# EAGLE board ai_breakout_mics2714_panel (EAGLE 6.6.0)
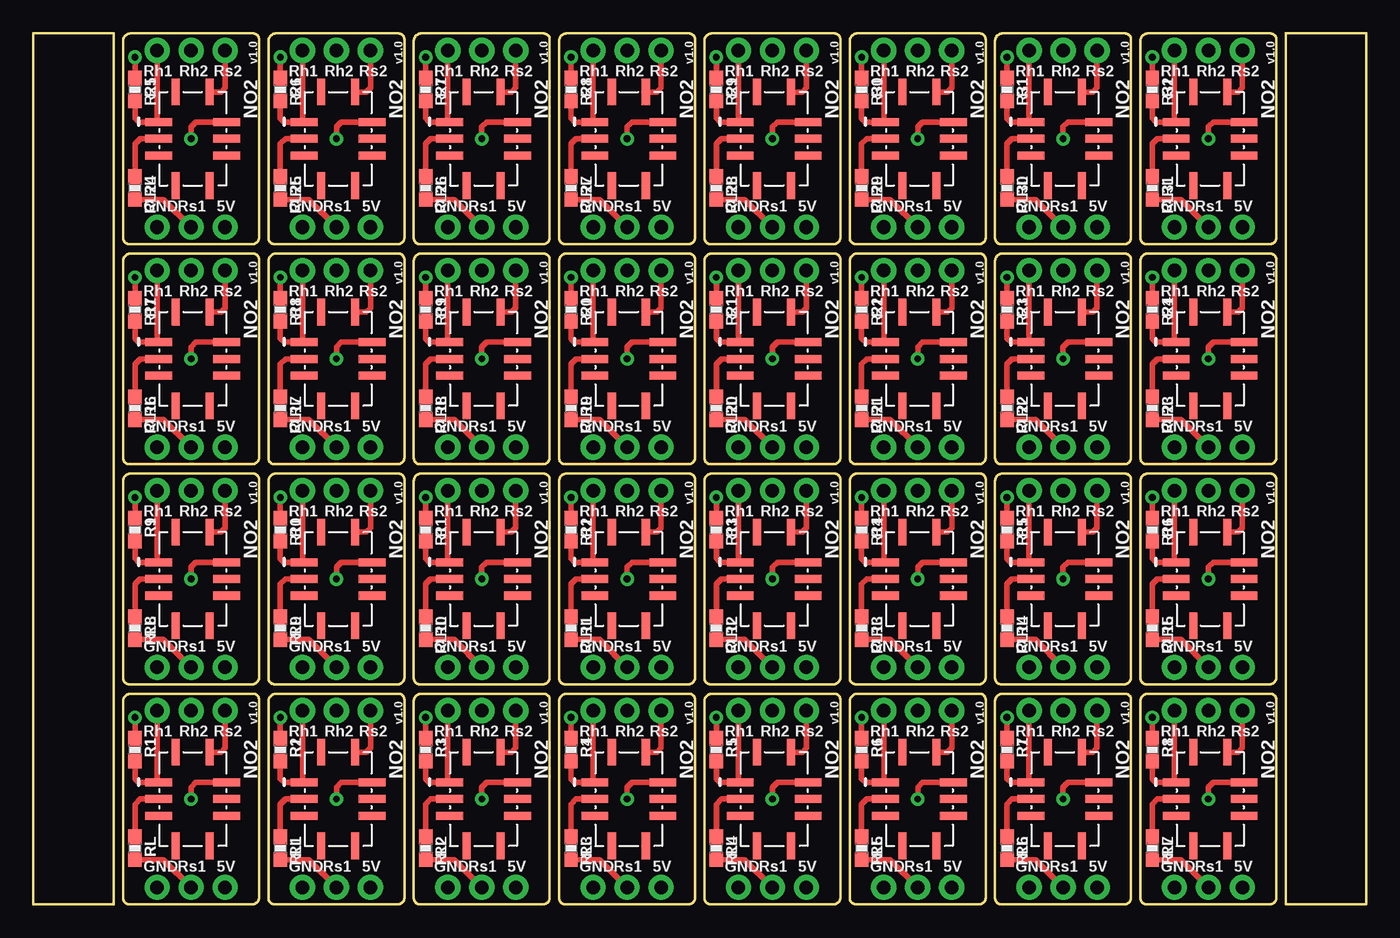
[diagram p0: board, top side]
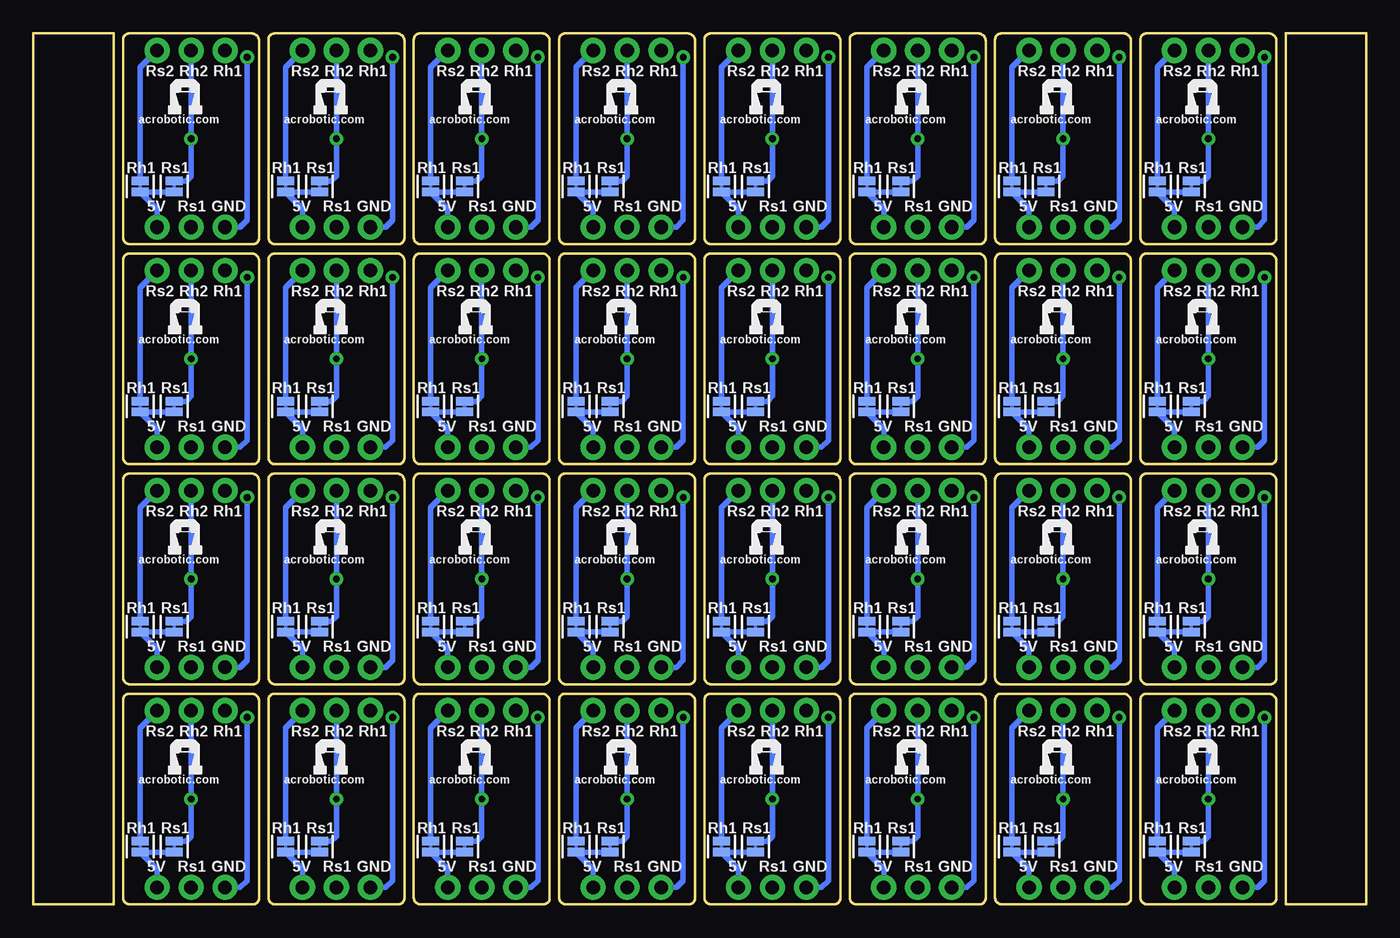
[diagram p1: board, bottom side, seen from below]

Size 99.58 x 65.09 mm. Coordinates in mm from the lower left corner, seen from the top.
Outline: 264 segments
Copper layers (1*16): Top 0.035mm / dielectric 1.5mm / Bottom 0.035mm
Design rules "ai_2layer": minimum track width 7mil, minimum drill 15mil, track to track 8mil, track to pad 8mil, pad to pad 8mil, via to via 8mil, smd to smd 8mil, copper to edge 8mil, drill to drill 8mil, minimum pad ring 12mil, minimum via ring 10mil, stop-mask expansion 4mil, vias tented up to drill 20mil, thermal gap 10mil
Net classes: 0 signal: width 0.254 mm; 1 power: width 0.305 mm

## Footprints (pad centres in the part's own frame; a part is rotated, then mirrored left to right if it is on the bottom)
1X03-NOFIRST = drill 1.016 pad 1.88: 1 -2.54,0; 2 0,0; 3 2.54,0
1X02-SJ-NCT = smd 0.635 x 1.27: 1 -0.401,0; 2 0.413,0
RES-0603 = smd 1.1 x 1: 1 -0.85,0; 2 0.85,0
MICS-2714 = smd 0.6 x 2: A -1.25,-2.54; B 0,-2.54; C 1.25,-2.54; F 1.25,2.54; G 0,2.54; H -1.25,2.54 | smd 2 x 0.6: D 3.5,-1.27; E 3.5,1.27; J -3.5,1.27; K -3.5,-1.27

## Placement (x,y rotation side)
J1  1X03NOFIRST  [1X03-NOFIRST]  11.78,14.48 180 top
J2  1X03NOFIRST  [1X03-NOFIRST]  11.78,1.27 180 top
J3  1X03NOFIRST  [1X03-NOFIRST]  22.64,14.48 180 top
J4  1X03NOFIRST  [1X03-NOFIRST]  22.64,1.27 180 top
J5  1X03NOFIRST  [1X03-NOFIRST]  33.5,14.48 180 top
J6  1X03NOFIRST  [1X03-NOFIRST]  33.5,1.27 180 top
J7  1X03NOFIRST  [1X03-NOFIRST]  44.36,14.48 180 top
J8  1X03NOFIRST  [1X03-NOFIRST]  44.36,1.27 180 top
J9  1X03NOFIRST  [1X03-NOFIRST]  55.22,14.48 180 top
J10  1X03NOFIRST  [1X03-NOFIRST]  55.22,1.27 180 top
J11  1X03NOFIRST  [1X03-NOFIRST]  66.08,14.48 180 top
J12  1X03NOFIRST  [1X03-NOFIRST]  66.08,1.27 180 top
J13  1X03NOFIRST  [1X03-NOFIRST]  76.94,14.48 180 top
J14  1X03NOFIRST  [1X03-NOFIRST]  76.94,1.27 180 top
J15  1X03NOFIRST  [1X03-NOFIRST]  87.8,14.48 180 top
J16  1X03NOFIRST  [1X03-NOFIRST]  87.8,1.27 180 top
J17  1X03NOFIRST  [1X03-NOFIRST]  11.78,30.93 180 top
J18  1X03NOFIRST  [1X03-NOFIRST]  11.78,17.72 180 top
J19  1X03NOFIRST  [1X03-NOFIRST]  22.64,30.93 180 top
J20  1X03NOFIRST  [1X03-NOFIRST]  22.64,17.72 180 top
J21  1X03NOFIRST  [1X03-NOFIRST]  33.5,30.93 180 top
J22  1X03NOFIRST  [1X03-NOFIRST]  33.5,17.72 180 top
J23  1X03NOFIRST  [1X03-NOFIRST]  44.36,30.93 180 top
J24  1X03NOFIRST  [1X03-NOFIRST]  44.36,17.72 180 top
J25  1X03NOFIRST  [1X03-NOFIRST]  55.22,30.93 180 top
J26  1X03NOFIRST  [1X03-NOFIRST]  55.22,17.72 180 top
J27  1X03NOFIRST  [1X03-NOFIRST]  66.08,30.93 180 top
J28  1X03NOFIRST  [1X03-NOFIRST]  66.08,17.72 180 top
J29  1X03NOFIRST  [1X03-NOFIRST]  76.94,30.93 180 top
J30  1X03NOFIRST  [1X03-NOFIRST]  76.94,17.72 180 top
J31  1X03NOFIRST  [1X03-NOFIRST]  87.8,30.93 180 top
J32  1X03NOFIRST  [1X03-NOFIRST]  87.8,17.72 180 top
J33  1X03NOFIRST  [1X03-NOFIRST]  11.78,47.37 180 top
J34  1X03NOFIRST  [1X03-NOFIRST]  11.78,34.17 180 top
J35  1X03NOFIRST  [1X03-NOFIRST]  22.64,47.37 180 top
J36  1X03NOFIRST  [1X03-NOFIRST]  22.64,34.17 180 top
J37  1X03NOFIRST  [1X03-NOFIRST]  33.5,47.37 180 top
J38  1X03NOFIRST  [1X03-NOFIRST]  33.5,34.17 180 top
J39  1X03NOFIRST  [1X03-NOFIRST]  44.36,47.37 180 top
J40  1X03NOFIRST  [1X03-NOFIRST]  44.36,34.17 180 top
J41  1X03NOFIRST  [1X03-NOFIRST]  55.22,47.37 180 top
J42  1X03NOFIRST  [1X03-NOFIRST]  55.22,34.17 180 top
J43  1X03NOFIRST  [1X03-NOFIRST]  66.08,47.37 180 top
J44  1X03NOFIRST  [1X03-NOFIRST]  66.08,34.17 180 top
J45  1X03NOFIRST  [1X03-NOFIRST]  76.94,47.37 180 top
J46  1X03NOFIRST  [1X03-NOFIRST]  76.94,34.17 180 top
J47  1X03NOFIRST  [1X03-NOFIRST]  87.8,47.37 180 top
J48  1X03NOFIRST  [1X03-NOFIRST]  87.8,34.17 180 top
J49  1X03NOFIRST  [1X03-NOFIRST]  11.78,63.82 180 top
J50  1X03NOFIRST  [1X03-NOFIRST]  11.78,50.61 180 top
J51  1X03NOFIRST  [1X03-NOFIRST]  22.64,63.82 180 top
J52  1X03NOFIRST  [1X03-NOFIRST]  22.64,50.61 180 top
J53  1X03NOFIRST  [1X03-NOFIRST]  33.5,63.82 180 top
J54  1X03NOFIRST  [1X03-NOFIRST]  33.5,50.61 180 top
J55  1X03NOFIRST  [1X03-NOFIRST]  44.36,63.82 180 top
J56  1X03NOFIRST  [1X03-NOFIRST]  44.36,50.61 180 top
J57  1X03NOFIRST  [1X03-NOFIRST]  55.22,63.82 180 top
J58  1X03NOFIRST  [1X03-NOFIRST]  55.22,50.61 180 top
J59  1X03NOFIRST  [1X03-NOFIRST]  66.08,63.82 180 top
J60  1X03NOFIRST  [1X03-NOFIRST]  66.08,50.61 180 top
J61  1X03NOFIRST  [1X03-NOFIRST]  76.94,63.82 180 top
J62  1X03NOFIRST  [1X03-NOFIRST]  76.94,50.61 180 top
J63  1X03NOFIRST  [1X03-NOFIRST]  87.8,63.82 180 top
J64  1X03NOFIRST  [1X03-NOFIRST]  87.8,50.61 180 top
JS1  1X02-SJ-NCT  [1X02-SJ-NCT]  15.59,4.32 270 bottom
JS2  1X02-SJ-NCT  [1X02-SJ-NCT]  13.05,4.32 270 bottom
JS3  1X02-SJ-NCT  [1X02-SJ-NCT]  26.45,4.32 270 bottom
JS4  1X02-SJ-NCT  [1X02-SJ-NCT]  23.91,4.32 270 bottom
JS5  1X02-SJ-NCT  [1X02-SJ-NCT]  37.31,4.32 270 bottom
JS6  1X02-SJ-NCT  [1X02-SJ-NCT]  34.77,4.32 270 bottom
JS7  1X02-SJ-NCT  [1X02-SJ-NCT]  48.17,4.32 270 bottom
JS8  1X02-SJ-NCT  [1X02-SJ-NCT]  45.63,4.32 270 bottom
JS9  1X02-SJ-NCT  [1X02-SJ-NCT]  59.03,4.32 270 bottom
JS10  1X02-SJ-NCT  [1X02-SJ-NCT]  56.49,4.32 270 bottom
JS11  1X02-SJ-NCT  [1X02-SJ-NCT]  69.89,4.32 270 bottom
JS12  1X02-SJ-NCT  [1X02-SJ-NCT]  67.35,4.32 270 bottom
JS13  1X02-SJ-NCT  [1X02-SJ-NCT]  80.75,4.32 270 bottom
JS14  1X02-SJ-NCT  [1X02-SJ-NCT]  78.21,4.32 270 bottom
JS15  1X02-SJ-NCT  [1X02-SJ-NCT]  91.61,4.32 270 bottom
JS16  1X02-SJ-NCT  [1X02-SJ-NCT]  89.07,4.32 270 bottom
JS17  1X02-SJ-NCT  [1X02-SJ-NCT]  15.59,20.77 270 bottom
JS18  1X02-SJ-NCT  [1X02-SJ-NCT]  13.05,20.77 270 bottom
JS19  1X02-SJ-NCT  [1X02-SJ-NCT]  26.45,20.77 270 bottom
JS20  1X02-SJ-NCT  [1X02-SJ-NCT]  23.91,20.77 270 bottom
JS21  1X02-SJ-NCT  [1X02-SJ-NCT]  37.31,20.77 270 bottom
JS22  1X02-SJ-NCT  [1X02-SJ-NCT]  34.77,20.77 270 bottom
JS23  1X02-SJ-NCT  [1X02-SJ-NCT]  48.17,20.77 270 bottom
JS24  1X02-SJ-NCT  [1X02-SJ-NCT]  45.63,20.77 270 bottom
JS25  1X02-SJ-NCT  [1X02-SJ-NCT]  59.03,20.77 270 bottom
JS26  1X02-SJ-NCT  [1X02-SJ-NCT]  56.49,20.77 270 bottom
JS27  1X02-SJ-NCT  [1X02-SJ-NCT]  69.89,20.77 270 bottom
JS28  1X02-SJ-NCT  [1X02-SJ-NCT]  67.35,20.77 270 bottom
JS29  1X02-SJ-NCT  [1X02-SJ-NCT]  80.75,20.77 270 bottom
JS30  1X02-SJ-NCT  [1X02-SJ-NCT]  78.21,20.77 270 bottom
JS31  1X02-SJ-NCT  [1X02-SJ-NCT]  91.61,20.77 270 bottom
JS32  1X02-SJ-NCT  [1X02-SJ-NCT]  89.07,20.77 270 bottom
JS33  1X02-SJ-NCT  [1X02-SJ-NCT]  15.59,37.21 270 bottom
JS34  1X02-SJ-NCT  [1X02-SJ-NCT]  13.05,37.21 270 bottom
JS35  1X02-SJ-NCT  [1X02-SJ-NCT]  26.45,37.21 270 bottom
JS36  1X02-SJ-NCT  [1X02-SJ-NCT]  23.91,37.21 270 bottom
JS37  1X02-SJ-NCT  [1X02-SJ-NCT]  37.31,37.21 270 bottom
JS38  1X02-SJ-NCT  [1X02-SJ-NCT]  34.77,37.21 270 bottom
JS39  1X02-SJ-NCT  [1X02-SJ-NCT]  48.17,37.21 270 bottom
JS40  1X02-SJ-NCT  [1X02-SJ-NCT]  45.63,37.21 270 bottom
JS41  1X02-SJ-NCT  [1X02-SJ-NCT]  59.03,37.21 270 bottom
JS42  1X02-SJ-NCT  [1X02-SJ-NCT]  56.49,37.21 270 bottom
JS43  1X02-SJ-NCT  [1X02-SJ-NCT]  69.89,37.21 270 bottom
JS44  1X02-SJ-NCT  [1X02-SJ-NCT]  67.35,37.21 270 bottom
JS45  1X02-SJ-NCT  [1X02-SJ-NCT]  80.75,37.21 270 bottom
JS46  1X02-SJ-NCT  [1X02-SJ-NCT]  78.21,37.21 270 bottom
JS47  1X02-SJ-NCT  [1X02-SJ-NCT]  91.61,37.21 270 bottom
JS48  1X02-SJ-NCT  [1X02-SJ-NCT]  89.07,37.21 270 bottom
JS49  1X02-SJ-NCT  [1X02-SJ-NCT]  15.59,53.66 270 bottom
JS50  1X02-SJ-NCT  [1X02-SJ-NCT]  13.05,53.66 270 bottom
JS51  1X02-SJ-NCT  [1X02-SJ-NCT]  26.45,53.66 270 bottom
JS52  1X02-SJ-NCT  [1X02-SJ-NCT]  23.91,53.66 270 bottom
JS53  1X02-SJ-NCT  [1X02-SJ-NCT]  37.31,53.66 270 bottom
JS54  1X02-SJ-NCT  [1X02-SJ-NCT]  34.77,53.66 270 bottom
JS55  1X02-SJ-NCT  [1X02-SJ-NCT]  48.17,53.66 270 bottom
JS56  1X02-SJ-NCT  [1X02-SJ-NCT]  45.63,53.66 270 bottom
JS57  1X02-SJ-NCT  [1X02-SJ-NCT]  59.03,53.66 270 bottom
JS58  1X02-SJ-NCT  [1X02-SJ-NCT]  56.49,53.66 270 bottom
JS59  1X02-SJ-NCT  [1X02-SJ-NCT]  69.89,53.66 270 bottom
JS60  1X02-SJ-NCT  [1X02-SJ-NCT]  67.35,53.66 270 bottom
JS61  1X02-SJ-NCT  [1X02-SJ-NCT]  80.75,53.66 270 bottom
JS62  1X02-SJ-NCT  [1X02-SJ-NCT]  78.21,53.66 270 bottom
JS63  1X02-SJ-NCT  [1X02-SJ-NCT]  91.61,53.66 270 bottom
JS64  1X02-SJ-NCT  [1X02-SJ-NCT]  89.07,53.66 270 bottom
R1  131  [RES-0603]  7.59,11.56 270 top
R2  131  [RES-0603]  18.45,11.56 270 top
R3  131  [RES-0603]  29.31,11.56 270 top
R4  131  [RES-0603]  40.17,11.56 270 top
R5  131  [RES-0603]  51.03,11.56 270 top
R6  131  [RES-0603]  61.89,11.56 270 top
R7  131  [RES-0603]  72.75,11.56 270 top
R8  131  [RES-0603]  83.61,11.56 270 top
R9  131  [RES-0603]  7.59,28 270 top
R10  131  [RES-0603]  18.45,28 270 top
R11  131  [RES-0603]  29.31,28 270 top
R12  131  [RES-0603]  40.17,28 270 top
R13  131  [RES-0603]  51.03,28 270 top
R14  131  [RES-0603]  61.89,28 270 top
R15  131  [RES-0603]  72.75,28 270 top
R16  131  [RES-0603]  83.61,28 270 top
R17  131  [RES-0603]  7.59,44.45 270 top
R18  131  [RES-0603]  18.45,44.45 270 top
R19  131  [RES-0603]  29.31,44.45 270 top
R20  131  [RES-0603]  40.17,44.45 270 top
R21  131  [RES-0603]  51.03,44.45 270 top
R22  131  [RES-0603]  61.89,44.45 270 top
R23  131  [RES-0603]  72.75,44.45 270 top
R24  131  [RES-0603]  83.61,44.45 270 top
R25  131  [RES-0603]  7.59,60.9 270 top
R26  131  [RES-0603]  18.45,60.9 270 top
R27  131  [RES-0603]  29.31,60.9 270 top
R28  131  [RES-0603]  40.17,60.9 270 top
R29  131  [RES-0603]  51.03,60.9 270 top
R30  131  [RES-0603]  61.89,60.9 270 top
R31  131  [RES-0603]  72.75,60.9 270 top
R32  131  [RES-0603]  83.61,60.9 270 top
RL  820  [RES-0603]  7.59,4.19 270 top
RL1  820  [RES-0603]  18.45,4.19 270 top
RL2  820  [RES-0603]  29.31,4.19 270 top
RL3  820  [RES-0603]  40.17,4.19 270 top
RL4  820  [RES-0603]  51.03,4.19 270 top
RL5  820  [RES-0603]  61.89,4.19 270 top
RL6  820  [RES-0603]  72.75,4.19 270 top
RL7  820  [RES-0603]  83.61,4.19 270 top
RL8  820  [RES-0603]  7.59,20.64 270 top
RL9  820  [RES-0603]  18.45,20.64 270 top
RL10  820  [RES-0603]  29.31,20.64 270 top
RL11  820  [RES-0603]  40.17,20.64 270 top
RL12  820  [RES-0603]  51.03,20.64 270 top
RL13  820  [RES-0603]  61.89,20.64 270 top
RL14  820  [RES-0603]  72.75,20.64 270 top
RL15  820  [RES-0603]  83.61,20.64 270 top
RL16  820  [RES-0603]  7.59,37.09 270 top
RL17  820  [RES-0603]  18.45,37.09 270 top
RL18  820  [RES-0603]  29.31,37.09 270 top
RL19  820  [RES-0603]  40.17,37.09 270 top
RL20  820  [RES-0603]  51.03,37.09 270 top
RL21  820  [RES-0603]  61.89,37.09 270 top
RL22  820  [RES-0603]  72.75,37.09 270 top
RL23  820  [RES-0603]  83.61,37.09 270 top
RL24  820  [RES-0603]  7.59,53.53 270 top
RL25  820  [RES-0603]  18.45,53.53 270 top
RL26  820  [RES-0603]  29.31,53.53 270 top
RL27  820  [RES-0603]  40.17,53.53 270 top
RL28  820  [RES-0603]  51.03,53.53 270 top
RL29  820  [RES-0603]  61.89,53.53 270 top
RL30  820  [RES-0603]  72.75,53.53 270 top
RL31  820  [RES-0603]  83.61,53.53 270 top
U1  MICS-2714  [MICS-2714]  11.91,7.87 270 top
U2  MICS-2714  [MICS-2714]  22.77,7.87 270 top
U3  MICS-2714  [MICS-2714]  33.63,7.87 270 top
U4  MICS-2714  [MICS-2714]  44.49,7.87 270 top
U5  MICS-2714  [MICS-2714]  55.35,7.87 270 top
U6  MICS-2714  [MICS-2714]  66.21,7.87 270 top
U7  MICS-2714  [MICS-2714]  77.07,7.87 270 top
U8  MICS-2714  [MICS-2714]  87.93,7.87 270 top
U9  MICS-2714  [MICS-2714]  11.91,24.32 270 top
U10  MICS-2714  [MICS-2714]  22.77,24.32 270 top
U11  MICS-2714  [MICS-2714]  33.63,24.32 270 top
U12  MICS-2714  [MICS-2714]  44.49,24.32 270 top
U13  MICS-2714  [MICS-2714]  55.35,24.32 270 top
U14  MICS-2714  [MICS-2714]  66.21,24.32 270 top
U15  MICS-2714  [MICS-2714]  77.07,24.32 270 top
U16  MICS-2714  [MICS-2714]  87.93,24.32 270 top
U17  MICS-2714  [MICS-2714]  11.91,40.77 270 top
U18  MICS-2714  [MICS-2714]  22.77,40.77 270 top
U19  MICS-2714  [MICS-2714]  33.63,40.77 270 top
U20  MICS-2714  [MICS-2714]  44.49,40.77 270 top
U21  MICS-2714  [MICS-2714]  55.35,40.77 270 top
U22  MICS-2714  [MICS-2714]  66.21,40.77 270 top
U23  MICS-2714  [MICS-2714]  77.07,40.77 270 top
U24  MICS-2714  [MICS-2714]  87.93,40.77 270 top
U25  MICS-2714  [MICS-2714]  11.91,57.22 270 top
U26  MICS-2714  [MICS-2714]  22.77,57.22 270 top
U27  MICS-2714  [MICS-2714]  33.63,57.22 270 top
U28  MICS-2714  [MICS-2714]  44.49,57.22 270 top
U29  MICS-2714  [MICS-2714]  55.35,57.22 270 top
U30  MICS-2714  [MICS-2714]  66.21,57.22 270 top
U31  MICS-2714  [MICS-2714]  77.07,57.22 270 top
U32  MICS-2714  [MICS-2714]  87.93,57.22 270 top
U$1  AI-LOGOXS  [AI-LOGO-XS]  24.42,9.65 0 bottom
U$2  AI-LOGOXS  [AI-LOGO-XS]  35.28,9.65 0 bottom
U$3  AI-LOGOXS  [AI-LOGO-XS]  13.56,9.65 0 bottom
U$4  AI-LOGOXS  [AI-LOGO-XS]  46.14,9.65 0 bottom
U$5  AI-LOGOXS  [AI-LOGO-XS]  57,9.65 0 bottom
U$6  AI-LOGOXS  [AI-LOGO-XS]  67.86,9.65 0 bottom
U$7  AI-LOGOXS  [AI-LOGO-XS]  78.72,9.65 0 bottom
U$8  AI-LOGOXS  [AI-LOGO-XS]  89.58,9.65 0 bottom
U$9  AI-LOGOXS  [AI-LOGO-XS]  13.56,26.1 0 bottom
U$10  AI-LOGOXS  [AI-LOGO-XS]  24.42,26.1 0 bottom
U$11  AI-LOGOXS  [AI-LOGO-XS]  35.28,26.1 0 bottom
U$12  AI-LOGOXS  [AI-LOGO-XS]  46.14,26.1 0 bottom
U$13  AI-LOGOXS  [AI-LOGO-XS]  57,26.1 0 bottom
U$14  AI-LOGOXS  [AI-LOGO-XS]  67.86,26.1 0 bottom
U$15  AI-LOGOXS  [AI-LOGO-XS]  78.72,26.1 0 bottom
U$16  AI-LOGOXS  [AI-LOGO-XS]  89.58,26.1 0 bottom
U$17  AI-LOGOXS  [AI-LOGO-XS]  13.56,42.55 0 bottom
U$18  AI-LOGOXS  [AI-LOGO-XS]  24.42,42.55 0 bottom
U$19  AI-LOGOXS  [AI-LOGO-XS]  35.28,42.55 0 bottom
U$20  AI-LOGOXS  [AI-LOGO-XS]  46.14,42.55 0 bottom
U$21  AI-LOGOXS  [AI-LOGO-XS]  57,42.55 0 bottom
U$22  AI-LOGOXS  [AI-LOGO-XS]  67.86,42.55 0 bottom
U$23  AI-LOGOXS  [AI-LOGO-XS]  78.72,42.55 0 bottom
U$24  AI-LOGOXS  [AI-LOGO-XS]  89.58,42.55 0 bottom
U$25  AI-LOGOXS  [AI-LOGO-XS]  13.56,59 0 bottom
U$26  AI-LOGOXS  [AI-LOGO-XS]  24.42,59 0 bottom
U$27  AI-LOGOXS  [AI-LOGO-XS]  35.28,59 0 bottom
U$28  AI-LOGOXS  [AI-LOGO-XS]  46.14,59 0 bottom
U$29  AI-LOGOXS  [AI-LOGO-XS]  57,59 0 bottom
U$30  AI-LOGOXS  [AI-LOGO-XS]  67.86,59 0 bottom
U$31  AI-LOGOXS  [AI-LOGO-XS]  78.72,59 0 bottom
U$32  AI-LOGOXS  [AI-LOGO-XS]  89.58,59 0 bottom

## Library data of the parts
J1-J64 JS1-JS64 = Ai_Connectors
R1-R32 RL RL1-RL31 = Ai_Passives
U1-U32 = Ai_IC
U$1-U$32 = Ai_Miscellany

## Nets
5V [power]: J2.1 JS1.2 JS2.2
5V1 [power]: J4.1 JS3.2 JS4.2
5V2 [power]: J6.1 JS5.2 JS6.2
5V3 [power]: J8.1 JS7.2 JS8.2
5V4 [power]: J10.1 JS9.2 JS10.2
5V5 [power]: J12.1 JS11.2 JS12.2
5V6 [power]: J14.1 JS13.2 JS14.2
5V7 [power]: J16.1 JS15.2 JS16.2
5V8 [power]: J18.1 JS17.2 JS18.2
5V9 [power]: J20.1 JS19.2 JS20.2
5V10 [power]: J22.1 JS21.2 JS22.2
5V11 [power]: J24.1 JS23.2 JS24.2
5V12 [power]: J26.1 JS25.2 JS26.2
5V13 [power]: J28.1 JS27.2 JS28.2
5V14 [power]: J30.1 JS29.2 JS30.2
5V15 [power]: J32.1 JS31.2 JS32.2
5V16 [power]: J34.1 JS33.2 JS34.2
5V17 [power]: J36.1 JS35.2 JS36.2
5V18 [power]: J38.1 JS37.2 JS38.2
5V19 [power]: J40.1 JS39.2 JS40.2
5V20 [power]: J42.1 JS41.2 JS42.2
5V21 [power]: J44.1 JS43.2 JS44.2
5V22 [power]: J46.1 JS45.2 JS46.2
5V23 [power]: J48.1 JS47.2 JS48.2
5V24 [power]: J50.1 JS49.2 JS50.2
5V25 [power]: J52.1 JS51.2 JS52.2
5V26 [power]: J54.1 JS53.2 JS54.2
5V27 [power]: J56.1 JS55.2 JS56.2
5V28 [power]: J58.1 JS57.2 JS58.2
5V29 [power]: J60.1 JS59.2 JS60.2
5V30 [power]: J62.1 JS61.2 JS62.2
5V31 [power]: J64.1 JS63.2 JS64.2
A/RH1: J1.3 R1.2 U1.A
A/RH2: J3.3 R2.2 U2.A
A/RH3: J5.3 R3.2 U3.A
A/RH4: J7.3 R4.2 U4.A
A/RH5: J9.3 R5.2 U5.A
A/RH6: J11.3 R6.2 U6.A
A/RH7: J13.3 R7.2 U7.A
A/RH8: J15.3 R8.2 U8.A
A/RH9: J17.3 R9.2 U9.A
A/RH10: J19.3 R10.2 U10.A
A/RH11: J21.3 R11.2 U11.A
A/RH12: J23.3 R12.2 U12.A
A/RH13: J25.3 R13.2 U13.A
A/RH14: J27.3 R14.2 U14.A
A/RH15: J29.3 R15.2 U15.A
A/RH16: J31.3 R16.2 U16.A
A/RH17: J33.3 R17.2 U17.A
A/RH18: J35.3 R18.2 U18.A
A/RH19: J37.3 R19.2 U19.A
A/RH20: J39.3 R20.2 U20.A
A/RH21: J41.3 R21.2 U21.A
A/RH22: J43.3 R22.2 U22.A
A/RH23: J45.3 R23.2 U23.A
A/RH24: J47.3 R24.2 U24.A
A/RH25: J49.3 R25.2 U25.A
A/RH26: J51.3 R26.2 U26.A
A/RH27: J53.3 R27.2 U27.A
A/RH28: J55.3 R28.2 U28.A
A/RH29: J57.3 R29.2 U29.A
A/RH30: J59.3 R30.2 U30.A
A/RH31: J61.3 R31.2 U31.A
A/RH32: J63.3 R32.2 U32.A
B/RS1: J2.2 RL.2
B/RS2: J4.2 RL1.2
B/RS3: J6.2 RL2.2
B/RS4: J8.2 RL3.2
B/RS5: J10.2 RL4.2
B/RS6: J12.2 RL5.2
B/RS7: J14.2 RL6.2
B/RS8: J16.2 RL7.2
B/RS9: J18.2 RL8.2
B/RS10: J20.2 RL9.2
B/RS11: J22.2 RL10.2
B/RS12: J24.2 RL11.2
B/RS13: J26.2 RL12.2
B/RS14: J28.2 RL13.2
B/RS15: J30.2 RL14.2
B/RS16: J32.2 RL15.2
B/RS17: J34.2 RL16.2
B/RS18: J36.2 RL17.2
B/RS19: J38.2 RL18.2
B/RS20: J40.2 RL19.2
B/RS21: J42.2 RL20.2
B/RS22: J44.2 RL21.2
B/RS23: J46.2 RL22.2
B/RS24: J48.2 RL23.2
B/RS25: J50.2 RL24.2
B/RS26: J52.2 RL25.2
B/RS27: J54.2 RL26.2
B/RS28: J56.2 RL27.2
B/RS29: J58.2 RL28.2
B/RS30: J60.2 RL29.2
B/RS31: J62.2 RL30.2
B/RS32: J64.2 RL31.2
GND [power]: J2.3 R1.1
GND1 [power]: J4.3 R2.1
GND2 [power]: J6.3 R3.1
GND3 [power]: J8.3 R4.1
GND4 [power]: J10.3 R5.1
GND5 [power]: J12.3 R6.1
GND6 [power]: J14.3 R7.1
GND7 [power]: J16.3 R8.1
GND8 [power]: J18.3 R9.1
GND9 [power]: J20.3 R10.1
GND10 [power]: J22.3 R11.1
GND11 [power]: J24.3 R12.1
GND12 [power]: J26.3 R13.1
GND13 [power]: J28.3 R14.1
GND14 [power]: J30.3 R15.1
GND15 [power]: J32.3 R16.1
GND16 [power]: J34.3 R17.1
GND17 [power]: J36.3 R18.1
GND18 [power]: J38.3 R19.1
GND19 [power]: J40.3 R20.1
GND20 [power]: J42.3 R21.1
GND21 [power]: J44.3 R22.1
GND22 [power]: J46.3 R23.1
GND23 [power]: J48.3 R24.1
GND24 [power]: J50.3 R25.1
GND25 [power]: J52.3 R26.1
GND26 [power]: J54.3 R27.1
GND27 [power]: J56.3 R28.1
GND28 [power]: J58.3 R29.1
GND29 [power]: J60.3 R30.1
GND30 [power]: J62.3 R31.1
GND31 [power]: J64.3 R32.1
H/RH1: J3.2 JS4.1 U2.H
H/RH2: J1.2 JS2.1 U1.H
H/RH3: J5.2 JS6.1 U3.H
H/RH4: J7.2 JS8.1 U4.H
H/RH5: J9.2 JS10.1 U5.H
H/RH6: J11.2 JS12.1 U6.H
H/RH7: J13.2 JS14.1 U7.H
H/RH8: J15.2 JS16.1 U8.H
H/RH9: J17.2 JS18.1 U9.H
H/RH10: J19.2 JS20.1 U10.H
H/RH11: J21.2 JS22.1 U11.H
H/RH12: J23.2 JS24.1 U12.H
H/RH13: J25.2 JS26.1 U13.H
H/RH14: J27.2 JS28.1 U14.H
H/RH15: J29.2 JS30.1 U15.H
H/RH16: J31.2 JS32.1 U16.H
H/RH17: J33.2 JS34.1 U17.H
H/RH18: J35.2 JS36.1 U18.H
H/RH19: J37.2 JS38.1 U19.H
H/RH20: J39.2 JS40.1 U20.H
H/RH21: J41.2 JS42.1 U21.H
H/RH22: J43.2 JS44.1 U22.H
H/RH23: J45.2 JS46.1 U23.H
H/RH24: J47.2 JS48.1 U24.H
H/RH25: J49.2 JS50.1 U25.H
H/RH26: J51.2 JS52.1 U26.H
H/RH27: J53.2 JS54.1 U27.H
H/RH28: J55.2 JS56.1 U28.H
H/RH29: J57.2 JS58.1 U29.H
H/RH30: J59.2 JS60.1 U30.H
H/RH31: J61.2 JS62.1 U31.H
H/RH32: J63.2 JS64.1 U32.H
J/RS1: J3.1 JS3.1 U2.J
J/RS2: J1.1 JS1.1 U1.J
J/RS3: J5.1 JS5.1 U3.J
J/RS4: J7.1 JS7.1 U4.J
J/RS5: J9.1 JS9.1 U5.J
J/RS6: J11.1 JS11.1 U6.J
J/RS7: J13.1 JS13.1 U7.J
J/RS8: J15.1 JS15.1 U8.J
J/RS9: J17.1 JS17.1 U9.J
J/RS10: J19.1 JS19.1 U10.J
J/RS11: J21.1 JS21.1 U11.J
J/RS12: J23.1 JS23.1 U12.J
J/RS13: J25.1 JS25.1 U13.J
J/RS14: J27.1 JS27.1 U14.J
J/RS15: J29.1 JS29.1 U15.J
J/RS16: J31.1 JS31.1 U16.J
J/RS17: J33.1 JS33.1 U17.J
J/RS18: J35.1 JS35.1 U18.J
J/RS19: J37.1 JS37.1 U19.J
J/RS20: J39.1 JS39.1 U20.J
J/RS21: J41.1 JS41.1 U21.J
J/RS22: J43.1 JS43.1 U22.J
J/RS23: J45.1 JS45.1 U23.J
J/RS24: J47.1 JS47.1 U24.J
J/RS25: J49.1 JS49.1 U25.J
J/RS26: J51.1 JS51.1 U26.J
J/RS27: J53.1 JS53.1 U27.J
J/RS28: J55.1 JS55.1 U28.J
J/RS29: J57.1 JS57.1 U29.J
J/RS30: J59.1 JS59.1 U30.J
J/RS31: J61.1 JS61.1 U31.J
J/RS32: J63.1 JS63.1 U32.J
N$1: RL.1 U1.B
N$2: RL1.1 U2.B
N$3: RL2.1 U3.B
N$4: RL3.1 U4.B
N$5: RL4.1 U5.B
N$6: RL5.1 U6.B
N$7: RL6.1 U7.B
N$8: RL7.1 U8.B
N$9: RL8.1 U9.B
N$10: RL9.1 U10.B
N$11: RL10.1 U11.B
N$12: RL11.1 U12.B
N$13: RL12.1 U13.B
N$14: RL13.1 U14.B
N$15: RL14.1 U15.B
N$16: RL15.1 U16.B
N$17: RL16.1 U17.B
N$18: RL17.1 U18.B
N$19: RL18.1 U19.B
N$20: RL19.1 U20.B
N$21: RL20.1 U21.B
N$22: RL21.1 U22.B
N$23: RL22.1 U23.B
N$24: RL23.1 U24.B
N$25: RL24.1 U25.B
N$26: RL25.1 U26.B
N$27: RL26.1 U27.B
N$28: RL27.1 U28.B
N$29: RL28.1 U29.B
N$30: RL29.1 U30.B
N$31: RL30.1 U31.B
N$32: RL31.1 U32.B

## Tracks (layer width: path | path; a pad name or v marks a point on that pad's centre or on a via)
5V
  Bottom 0.406: J2.1 14.32,2.63 JS1.2 JS2.2
5V1
  Bottom 0.406: J4.1 25.18,2.63 JS3.2 JS4.2
5V2
  Bottom 0.406: J6.1 36.04,2.63 JS5.2 JS6.2
5V3
  Bottom 0.406: J8.1 46.9,2.63 JS7.2 JS8.2
5V4
  Bottom 0.406: J10.1 57.76,2.63 JS9.2 JS10.2
5V5
  Bottom 0.406: J12.1 68.62,2.63 JS11.2 JS12.2
5V6
  Bottom 0.406: J14.1 79.48,2.63 JS13.2 JS14.2
5V7
  Bottom 0.406: J16.1 90.34,2.63 JS15.2 JS16.2
5V8
  Bottom 0.406: J18.1 14.32,19.08 JS17.2 JS18.2
5V9
  Bottom 0.406: J20.1 25.18,19.08 JS19.2 JS20.2
5V10
  Bottom 0.406: J22.1 36.04,19.08 JS21.2 JS22.2
5V11
  Bottom 0.406: J24.1 46.9,19.08 JS23.2 JS24.2
5V12
  Bottom 0.406: J26.1 57.76,19.08 JS25.2 JS26.2
5V13
  Bottom 0.406: J28.1 68.62,19.08 JS27.2 JS28.2
5V14
  Bottom 0.406: J30.1 79.48,19.08 JS29.2 JS30.2
5V15
  Bottom 0.406: J32.1 90.34,19.08 JS31.2 JS32.2
5V16
  Bottom 0.406: J34.1 14.32,35.53 JS33.2 JS34.2
5V17
  Bottom 0.406: J36.1 25.18,35.53 JS35.2 JS36.2
5V18
  Bottom 0.406: J38.1 36.04,35.53 JS37.2 JS38.2
5V19
  Bottom 0.406: J40.1 46.9,35.53 JS39.2 JS40.2
5V20
  Bottom 0.406: J42.1 57.76,35.53 JS41.2 JS42.2
5V21
  Bottom 0.406: J44.1 68.62,35.53 JS43.2 JS44.2
5V22
  Bottom 0.406: J46.1 79.48,35.53 JS45.2 JS46.2
5V23
  Bottom 0.406: J48.1 90.34,35.53 JS47.2 JS48.2
5V24
  Bottom 0.406: J50.1 14.32,51.98 JS49.2 JS50.2
5V25
  Bottom 0.406: J52.1 25.18,51.98 JS51.2 JS52.2
5V26
  Bottom 0.406: J54.1 36.04,51.98 JS53.2 JS54.2
5V27
  Bottom 0.406: J56.1 46.9,51.98 JS55.2 JS56.2
5V28
  Bottom 0.406: J58.1 57.76,51.98 JS57.2 JS58.2
5V29
  Bottom 0.406: J60.1 68.62,51.98 JS59.2 JS60.2
5V30
  Bottom 0.406: J62.1 79.48,51.98 JS61.2 JS62.2
5V31
  Bottom 0.406: J64.1 90.34,51.98 JS63.2 JS64.2
A/RH1
  Top 0.406: R1.2 7.59,9.4 7.86,9.12 U1.A 9.24,9.25 J1.3
A/RH2
  Top 0.406: R2.2 18.45,9.4 18.72,9.12 U2.A 20.1,9.25 J3.3
A/RH3
  Top 0.406: R3.2 29.31,9.4 29.58,9.12 U3.A 30.96,9.25 J5.3
A/RH4
  Top 0.406: R4.2 40.17,9.4 40.44,9.12 U4.A 41.82,9.25 J7.3
A/RH5
  Top 0.406: R5.2 51.03,9.4 51.3,9.12 U5.A 52.68,9.25 J9.3
A/RH6
  Top 0.406: R6.2 61.89,9.4 62.16,9.12 U6.A 63.54,9.25 J11.3
A/RH7
  Top 0.406: R7.2 72.75,9.4 73.02,9.12 U7.A 74.4,9.25 J13.3
A/RH8
  Top 0.406: R8.2 83.61,9.4 83.88,9.12 U8.A 85.26,9.25 J15.3
A/RH9
  Top 0.406: R9.2 7.59,25.85 7.86,25.57 U9.A 9.24,25.7 J17.3
A/RH10
  Top 0.406: R10.2 18.45,25.85 18.72,25.57 U10.A 20.1,25.7 J19.3
A/RH11
  Top 0.406: R11.2 29.31,25.85 29.58,25.57 U11.A 30.96,25.7 J21.3
A/RH12
  Top 0.406: R12.2 40.17,25.85 40.44,25.57 U12.A 41.82,25.7 J23.3
A/RH13
  Top 0.406: R13.2 51.03,25.85 51.3,25.57 U13.A 52.68,25.7 J25.3
A/RH14
  Top 0.406: R14.2 61.89,25.85 62.16,25.57 U14.A 63.54,25.7 J27.3
A/RH15
  Top 0.406: R15.2 72.75,25.85 73.02,25.57 U15.A 74.4,25.7 J29.3
A/RH16
  Top 0.406: R16.2 83.61,25.85 83.88,25.57 U16.A 85.26,25.7 J31.3
A/RH17
  Top 0.406: R17.2 7.59,42.29 7.86,42.02 U17.A 9.24,42.15 J33.3
A/RH18
  Top 0.406: R18.2 18.45,42.29 18.72,42.02 U18.A 20.1,42.15 J35.3
A/RH19
  Top 0.406: R19.2 29.31,42.29 29.58,42.02 U19.A 30.96,42.15 J37.3
A/RH20
  Top 0.406: R20.2 40.17,42.29 40.44,42.02 U20.A 41.82,42.15 J39.3
A/RH21
  Top 0.406: R21.2 51.03,42.29 51.3,42.02 U21.A 52.68,42.15 J41.3
A/RH22
  Top 0.406: R22.2 61.89,42.29 62.16,42.02 U22.A 63.54,42.15 J43.3
A/RH23
  Top 0.406: R23.2 72.75,42.29 73.02,42.02 U23.A 74.4,42.15 J45.3
A/RH24
  Top 0.406: R24.2 83.61,42.29 83.88,42.02 U24.A 85.26,42.15 J47.3
A/RH25
  Top 0.406: R25.2 7.59,58.74 7.86,58.47 U25.A 9.24,58.59 J49.3
A/RH26
  Top 0.406: R26.2 18.45,58.74 18.72,58.47 U26.A 20.1,58.59 J51.3
A/RH27
  Top 0.406: R27.2 29.31,58.74 29.58,58.47 U27.A 30.96,58.59 J53.3
A/RH28
  Top 0.406: R28.2 40.17,58.74 40.44,58.47 U28.A 41.82,58.59 J55.3
A/RH29
  Top 0.406: R29.2 51.03,58.74 51.3,58.47 U29.A 52.68,58.59 J57.3
A/RH30
  Top 0.406: R30.2 61.89,58.74 62.16,58.47 U30.A 63.54,58.59 J59.3
A/RH31
  Top 0.406: R31.2 72.75,58.74 73.02,58.47 U31.A 74.4,58.59 J61.3
A/RH32
  Top 0.406: R32.2 83.61,58.74 83.88,58.47 U32.A 85.26,58.59 J63.3
B/RS1
  Top 0.406: RL.2 9.71,3.34 J2.2
B/RS2
  Top 0.406: RL1.2 20.57,3.34 J4.2
B/RS3
  Top 0.406: RL2.2 31.43,3.34 J6.2
B/RS4
  Top 0.406: RL3.2 42.29,3.34 J8.2
B/RS5
  Top 0.406: RL4.2 53.15,3.34 J10.2
B/RS6
  Top 0.406: RL5.2 64.01,3.34 J12.2
B/RS7
  Top 0.406: RL6.2 74.87,3.34 J14.2
B/RS8
  Top 0.406: RL7.2 85.73,3.34 J16.2
B/RS9
  Top 0.406: RL8.2 9.71,19.79 J18.2
B/RS10
  Top 0.406: RL9.2 20.57,19.79 J20.2
B/RS11
  Top 0.406: RL10.2 31.43,19.79 J22.2
B/RS12
  Top 0.406: RL11.2 42.29,19.79 J24.2
B/RS13
  Top 0.406: RL12.2 53.15,19.79 J26.2
B/RS14
  Top 0.406: RL13.2 64.01,19.79 J28.2
B/RS15
  Top 0.406: RL14.2 74.87,19.79 J30.2
B/RS16
  Top 0.406: RL15.2 85.73,19.79 J32.2
B/RS17
  Top 0.406: RL16.2 9.71,36.24 J34.2
B/RS18
  Top 0.406: RL17.2 20.57,36.24 J36.2
B/RS19
  Top 0.406: RL18.2 31.43,36.24 J38.2
B/RS20
  Top 0.406: RL19.2 42.29,36.24 J40.2
B/RS21
  Top 0.406: RL20.2 53.15,36.24 J42.2
B/RS22
  Top 0.406: RL21.2 64.01,36.24 J44.2
B/RS23
  Top 0.406: RL22.2 74.87,36.24 J46.2
B/RS24
  Top 0.406: RL23.2 85.73,36.24 J48.2
B/RS25
  Top 0.406: RL24.2 9.71,52.69 J50.2
B/RS26
  Top 0.406: RL25.2 20.57,52.69 J52.2
B/RS27
  Top 0.406: RL26.2 31.43,52.69 J54.2
B/RS28
  Top 0.406: RL27.2 42.29,52.69 J56.2
B/RS29
  Top 0.406: RL28.2 53.15,52.69 J58.2
B/RS30
  Top 0.406: RL29.2 64.01,52.69 J60.2
B/RS31
  Top 0.406: RL30.2 74.87,52.69 J62.2
B/RS32
  Top 0.406: RL31.2 85.73,52.69 J64.2
GND  (via drill 0.51)
  Top 0.406: v7.59,13.97 R1.1
  Bottom 0.406: J2.3 8.1,1.27 7.59,1.78 v7.59,13.97
GND1  (via drill 0.51)
  Top 0.406: v18.45,13.97 R2.1
  Bottom 0.406: J4.3 18.96,1.27 18.45,1.78 v18.45,13.97
GND2  (via drill 0.51)
  Top 0.406: v29.31,13.97 R3.1
  Bottom 0.406: J6.3 29.82,1.27 29.31,1.78 v29.31,13.97
GND3  (via drill 0.51)
  Top 0.406: v40.17,13.97 R4.1
  Bottom 0.406: J8.3 40.68,1.27 40.17,1.78 v40.17,13.97
GND4  (via drill 0.51)
  Top 0.406: v51.03,13.97 R5.1
  Bottom 0.406: J10.3 51.54,1.27 51.03,1.78 v51.03,13.97
GND5  (via drill 0.51)
  Top 0.406: v61.89,13.97 R6.1
  Bottom 0.406: J12.3 62.4,1.27 61.89,1.78 v61.89,13.97
GND6  (via drill 0.51)
  Top 0.406: v72.75,13.97 R7.1
  Bottom 0.406: J14.3 73.26,1.27 72.75,1.78 v72.75,13.97
GND7  (via drill 0.51)
  Top 0.406: v83.61,13.97 R8.1
  Bottom 0.406: J16.3 84.12,1.27 83.61,1.78 v83.61,13.97
GND8  (via drill 0.51)
  Top 0.406: v7.59,30.42 R9.1
  Bottom 0.406: J18.3 8.1,17.72 7.59,18.23 v7.59,30.42
GND9  (via drill 0.51)
  Top 0.406: v18.45,30.42 R10.1
  Bottom 0.406: J20.3 18.96,17.72 18.45,18.23 v18.45,30.42
GND10  (via drill 0.51)
  Top 0.406: v29.31,30.42 R11.1
  Bottom 0.406: J22.3 29.82,17.72 29.31,18.23 v29.31,30.42
GND11  (via drill 0.51)
  Top 0.406: v40.17,30.42 R12.1
  Bottom 0.406: J24.3 40.68,17.72 40.17,18.23 v40.17,30.42
GND12  (via drill 0.51)
  Top 0.406: v51.03,30.42 R13.1
  Bottom 0.406: J26.3 51.54,17.72 51.03,18.23 v51.03,30.42
GND13  (via drill 0.51)
  Top 0.406: v61.89,30.42 R14.1
  Bottom 0.406: J28.3 62.4,17.72 61.89,18.23 v61.89,30.42
GND14  (via drill 0.51)
  Top 0.406: v72.75,30.42 R15.1
  Bottom 0.406: J30.3 73.26,17.72 72.75,18.23 v72.75,30.42
GND15  (via drill 0.51)
  Top 0.406: v83.61,30.42 R16.1
  Bottom 0.406: J32.3 84.12,17.72 83.61,18.23 v83.61,30.42
GND16  (via drill 0.51)
  Top 0.406: v7.59,46.87 R17.1
  Bottom 0.406: J34.3 8.1,34.17 7.59,34.67 v7.59,46.87
GND17  (via drill 0.51)
  Top 0.406: v18.45,46.87 R18.1
  Bottom 0.406: J36.3 18.96,34.17 18.45,34.67 v18.45,46.87
GND18  (via drill 0.51)
  Top 0.406: v29.31,46.87 R19.1
  Bottom 0.406: J38.3 29.82,34.17 29.31,34.67 v29.31,46.87
GND19  (via drill 0.51)
  Top 0.406: v40.17,46.87 R20.1
  Bottom 0.406: J40.3 40.68,34.17 40.17,34.67 v40.17,46.87
GND20  (via drill 0.51)
  Top 0.406: v51.03,46.87 R21.1
  Bottom 0.406: J42.3 51.54,34.17 51.03,34.67 v51.03,46.87
GND21  (via drill 0.51)
  Top 0.406: v61.89,46.87 R22.1
  Bottom 0.406: J44.3 62.4,34.17 61.89,34.67 v61.89,46.87
GND22  (via drill 0.51)
  Top 0.406: v72.75,46.87 R23.1
  Bottom 0.406: J46.3 73.26,34.17 72.75,34.67 v72.75,46.87
GND23  (via drill 0.51)
  Top 0.406: v83.61,46.87 R24.1
  Bottom 0.406: J48.3 84.12,34.17 83.61,34.67 v83.61,46.87
GND24  (via drill 0.51)
  Top 0.406: v7.59,63.31 R25.1
  Bottom 0.406: J50.3 8.1,50.61 7.59,51.12 v7.59,63.31
GND25  (via drill 0.51)
  Top 0.406: v18.45,63.31 R26.1
  Bottom 0.406: J52.3 18.96,50.61 18.45,51.12 v18.45,63.31
GND26  (via drill 0.51)
  Top 0.406: v29.31,63.31 R27.1
  Bottom 0.406: J54.3 29.82,50.61 29.31,51.12 v29.31,63.31
GND27  (via drill 0.51)
  Top 0.406: v40.17,63.31 R28.1
  Bottom 0.406: J56.3 40.68,50.61 40.17,51.12 v40.17,63.31
GND28  (via drill 0.51)
  Top 0.406: v51.03,63.31 R29.1
  Bottom 0.406: J58.3 51.54,50.61 51.03,51.12 v51.03,63.31
GND29  (via drill 0.51)
  Top 0.406: v61.89,63.31 R30.1
  Bottom 0.406: J60.3 62.4,50.61 61.89,51.12 v61.89,63.31
GND30  (via drill 0.51)
  Top 0.406: v72.75,63.31 R31.1
  Bottom 0.406: J62.3 73.26,50.61 72.75,51.12 v72.75,63.31
GND31  (via drill 0.51)
  Top 0.406: v83.61,63.31 R32.1
  Bottom 0.406: J64.3 84.12,50.61 83.61,51.12 v83.61,63.31
H/RH1  (via drill 0.51)
  Top 0.406: U2.H 23,9.12 22.64,8.76 v22.64,7.87
  Bottom 0.406: J3.2 v22.64,7.87 | v22.64,7.87 22.64,5.08 23.02,4.7 23.89,4.7 JS4.1 | v22.64,7.87 22.64,8.38
H/RH2  (via drill 0.51)
  Top 0.406: U1.H 12.14,9.12 11.78,8.76 v11.78,7.87
  Bottom 0.406: J1.2 v11.78,7.87 | v11.78,7.87 11.78,5.08 12.16,4.7 13.03,4.7 JS2.1 | v11.78,7.87 11.78,8.38
H/RH3  (via drill 0.51)
  Top 0.406: U3.H 33.86,9.12 33.5,8.76 v33.5,7.87
  Bottom 0.406: J5.2 v33.5,7.87 | v33.5,7.87 33.5,5.08 33.88,4.7 34.75,4.7 JS6.1 | v33.5,7.87 33.5,8.38
H/RH4  (via drill 0.51)
  Top 0.406: U4.H 44.72,9.12 44.36,8.76 v44.36,7.87
  Bottom 0.406: J7.2 v44.36,7.87 | v44.36,7.87 44.36,5.08 44.74,4.7 45.61,4.7 JS8.1 | v44.36,7.87 44.36,8.38
H/RH5  (via drill 0.51)
  Top 0.406: U5.H 55.58,9.12 55.22,8.76 v55.22,7.87
  Bottom 0.406: J9.2 v55.22,7.87 | v55.22,7.87 55.22,5.08 55.6,4.7 56.47,4.7 JS10.1 | v55.22,7.87 55.22,8.38
H/RH6  (via drill 0.51)
  Top 0.406: U6.H 66.44,9.12 66.08,8.76 v66.08,7.87
  Bottom 0.406: J11.2 v66.08,7.87 | v66.08,7.87 66.08,5.08 66.46,4.7 67.33,4.7 JS12.1 | v66.08,7.87 66.08,8.38
H/RH7  (via drill 0.51)
  Top 0.406: U7.H 77.3,9.12 76.94,8.76 v76.94,7.87
  Bottom 0.406: J13.2 v76.94,7.87 | v76.94,7.87 76.94,5.08 77.32,4.7 78.19,4.7 JS14.1 | v76.94,7.87 76.94,8.38
H/RH8  (via drill 0.51)
  Top 0.406: U8.H 88.16,9.12 87.8,8.76 v87.8,7.87
  Bottom 0.406: J15.2 v87.8,7.87 | v87.8,7.87 87.8,5.08 88.18,4.7 89.05,4.7 JS16.1 | v87.8,7.87 87.8,8.38
H/RH9  (via drill 0.51)
  Top 0.406: U9.H 12.14,25.57 11.78,25.21 v11.78,24.32
  Bottom 0.406: J17.2 v11.78,24.32 | v11.78,24.32 11.78,21.53 12.16,21.15 13.03,21.15 JS18.1 | v11.78,24.32 11.78,24.83
H/RH10  (via drill 0.51)
  Top 0.406: U10.H 23,25.57 22.64,25.21 v22.64,24.32
  Bottom 0.406: J19.2 v22.64,24.32 | v22.64,24.32 22.64,21.53 23.02,21.15 23.89,21.15 JS20.1 | v22.64,24.32 22.64,24.83
H/RH11  (via drill 0.51)
  Top 0.406: U11.H 33.86,25.57 33.5,25.21 v33.5,24.32
  Bottom 0.406: J21.2 v33.5,24.32 | v33.5,24.32 33.5,21.53 33.88,21.15 34.75,21.15 JS22.1 | v33.5,24.32 33.5,24.83
H/RH12  (via drill 0.51)
  Top 0.406: U12.H 44.72,25.57 44.36,25.21 v44.36,24.32
  Bottom 0.406: J23.2 v44.36,24.32 | v44.36,24.32 44.36,21.53 44.74,21.15 45.61,21.15 JS24.1 | v44.36,24.32 44.36,24.83
H/RH13  (via drill 0.51)
  Top 0.406: U13.H 55.58,25.57 55.22,25.21 v55.22,24.32
  Bottom 0.406: J25.2 v55.22,24.32 | v55.22,24.32 55.22,21.53 55.6,21.15 56.47,21.15 JS26.1 | v55.22,24.32 55.22,24.83
H/RH14  (via drill 0.51)
  Top 0.406: U14.H 66.44,25.57 66.08,25.21 v66.08,24.32
  Bottom 0.406: J27.2 v66.08,24.32 | v66.08,24.32 66.08,21.53 66.46,21.15 67.33,21.15 JS28.1 | v66.08,24.32 66.08,24.83
H/RH15  (via drill 0.51)
  Top 0.406: U15.H 77.3,25.57 76.94,25.21 v76.94,24.32
  Bottom 0.406: J29.2 v76.94,24.32 | v76.94,24.32 76.94,21.53 77.32,21.15 78.19,21.15 JS30.1 | v76.94,24.32 76.94,24.83
H/RH16  (via drill 0.51)
  Top 0.406: U16.H 88.16,25.57 87.8,25.21 v87.8,24.32
  Bottom 0.406: J31.2 v87.8,24.32 | v87.8,24.32 87.8,21.53 88.18,21.15 89.05,21.15 JS32.1 | v87.8,24.32 87.8,24.83
H/RH17  (via drill 0.51)
  Top 0.406: U17.H 12.14,42.02 11.78,41.66 v11.78,40.77
  Bottom 0.406: J33.2 v11.78,40.77 | v11.78,40.77 11.78,37.98 12.16,37.59 13.03,37.59 JS34.1 | v11.78,40.77 11.78,41.28
H/RH18  (via drill 0.51)
  Top 0.406: U18.H 23,42.02 22.64,41.66 v22.64,40.77
  Bottom 0.406: J35.2 v22.64,40.77 | v22.64,40.77 22.64,37.98 23.02,37.59 23.89,37.59 JS36.1 | v22.64,40.77 22.64,41.28
H/RH19  (via drill 0.51)
  Top 0.406: U19.H 33.86,42.02 33.5,41.66 v33.5,40.77
  Bottom 0.406: J37.2 v33.5,40.77 | v33.5,40.77 33.5,37.98 33.88,37.59 34.75,37.59 JS38.1 | v33.5,40.77 33.5,41.28
H/RH20  (via drill 0.51)
  Top 0.406: U20.H 44.72,42.02 44.36,41.66 v44.36,40.77
  Bottom 0.406: J39.2 v44.36,40.77 | v44.36,40.77 44.36,37.98 44.74,37.59 45.61,37.59 JS40.1 | v44.36,40.77 44.36,41.28
H/RH21  (via drill 0.51)
  Top 0.406: U21.H 55.58,42.02 55.22,41.66 v55.22,40.77
  Bottom 0.406: J41.2 v55.22,40.77 | v55.22,40.77 55.22,37.98 55.6,37.59 56.47,37.59 JS42.1 | v55.22,40.77 55.22,41.28
H/RH22  (via drill 0.51)
  Top 0.406: U22.H 66.44,42.02 66.08,41.66 v66.08,40.77
  Bottom 0.406: J43.2 v66.08,40.77 | v66.08,40.77 66.08,37.98 66.46,37.59 67.33,37.59 JS44.1 | v66.08,40.77 66.08,41.28
H/RH23  (via drill 0.51)
  Top 0.406: U23.H 77.3,42.02 76.94,41.66 v76.94,40.77
  Bottom 0.406: J45.2 v76.94,40.77 | v76.94,40.77 76.94,37.98 77.32,37.59 78.19,37.59 JS46.1 | v76.94,40.77 76.94,41.28
H/RH24  (via drill 0.51)
  Top 0.406: U24.H 88.16,42.02 87.8,41.66 v87.8,40.77
  Bottom 0.406: J47.2 v87.8,40.77 | v87.8,40.77 87.8,37.98 88.18,37.59 89.05,37.59 JS48.1 | v87.8,40.77 87.8,41.28
H/RH25  (via drill 0.51)
  Top 0.406: U25.H 12.14,58.47 11.78,58.11 v11.78,57.22
  Bottom 0.406: J49.2 v11.78,57.22 | v11.78,57.22 11.78,54.42 12.16,54.04 13.03,54.04 JS50.1 | v11.78,57.22 11.78,57.73
H/RH26  (via drill 0.51)
  Top 0.406: U26.H 23,58.47 22.64,58.11 v22.64,57.22
  Bottom 0.406: J51.2 v22.64,57.22 | v22.64,57.22 22.64,54.42 23.02,54.04 23.89,54.04 JS52.1 | v22.64,57.22 22.64,57.73
H/RH27  (via drill 0.51)
  Top 0.406: U27.H 33.86,58.47 33.5,58.11 v33.5,57.22
  Bottom 0.406: J53.2 v33.5,57.22 | v33.5,57.22 33.5,54.42 33.88,54.04 34.75,54.04 JS54.1 | v33.5,57.22 33.5,57.73
H/RH28  (via drill 0.51)
  Top 0.406: U28.H 44.72,58.47 44.36,58.11 v44.36,57.22
  Bottom 0.406: J55.2 v44.36,57.22 | v44.36,57.22 44.36,54.42 44.74,54.04 45.61,54.04 JS56.1 | v44.36,57.22 44.36,57.73
H/RH29  (via drill 0.51)
  Top 0.406: U29.H 55.58,58.47 55.22,58.11 v55.22,57.22
  Bottom 0.406: J57.2 v55.22,57.22 | v55.22,57.22 55.22,54.42 55.6,54.04 56.47,54.04 JS58.1 | v55.22,57.22 55.22,57.73
H/RH30  (via drill 0.51)
  Top 0.406: U30.H 66.44,58.47 66.08,58.11 v66.08,57.22
  Bottom 0.406: J59.2 v66.08,57.22 | v66.08,57.22 66.08,54.42 66.46,54.04 67.33,54.04 JS60.1 | v66.08,57.22 66.08,57.73
H/RH31  (via drill 0.51)
  Top 0.406: U31.H 77.3,58.47 76.94,58.11 v76.94,57.22
  Bottom 0.406: J61.2 v76.94,57.22 | v76.94,57.22 76.94,54.42 77.32,54.04 78.19,54.04 JS62.1 | v76.94,57.22 76.94,57.73
H/RH32  (via drill 0.51)
  Top 0.406: U32.H 88.16,58.47 87.8,58.11 v87.8,57.22
  Bottom 0.406: J63.2 v87.8,57.22 | v87.8,57.22 87.8,54.42 88.18,54.04 89.05,54.04 JS64.1 | v87.8,57.22 87.8,57.73
J/RS1
  Top 0.406: U2.J 24.87,11.37 25.18,11.68 J3.1
  Bottom 0.406: JS3.1 26.45,13.21 J3.1
J/RS2
  Top 0.406: U1.J 14.01,11.37 14.32,11.68 J1.1
  Bottom 0.406: JS1.1 15.59,13.21 J1.1
J/RS3
  Top 0.406: U3.J 35.73,11.37 36.04,11.68 J5.1
  Bottom 0.406: JS5.1 37.31,13.21 J5.1
J/RS4
  Top 0.406: U4.J 46.59,11.37 46.9,11.68 J7.1
  Bottom 0.406: JS7.1 48.17,13.21 J7.1
J/RS5
  Top 0.406: U5.J 57.45,11.37 57.76,11.68 J9.1
  Bottom 0.406: JS9.1 59.03,13.21 J9.1
J/RS6
  Top 0.406: U6.J 68.31,11.37 68.62,11.68 J11.1
  Bottom 0.406: JS11.1 69.89,13.21 J11.1
J/RS7
  Top 0.406: U7.J 79.17,11.37 79.48,11.68 J13.1
  Bottom 0.406: JS13.1 80.75,13.21 J13.1
J/RS8
  Top 0.406: U8.J 90.03,11.37 90.34,11.68 J15.1
  Bottom 0.406: JS15.1 91.61,13.21 J15.1
J/RS9
  Top 0.406: U9.J 14.01,27.82 14.32,28.13 J17.1
  Bottom 0.406: JS17.1 15.59,29.66 J17.1
J/RS10
  Top 0.406: U10.J 24.87,27.82 25.18,28.13 J19.1
  Bottom 0.406: JS19.1 26.45,29.66 J19.1
J/RS11
  Top 0.406: U11.J 35.73,27.82 36.04,28.13 J21.1
  Bottom 0.406: JS21.1 37.31,29.66 J21.1
J/RS12
  Top 0.406: U12.J 46.59,27.82 46.9,28.13 J23.1
  Bottom 0.406: JS23.1 48.17,29.66 J23.1
J/RS13
  Top 0.406: U13.J 57.45,27.82 57.76,28.13 J25.1
  Bottom 0.406: JS25.1 59.03,29.66 J25.1
J/RS14
  Top 0.406: U14.J 68.31,27.82 68.62,28.13 J27.1
  Bottom 0.406: JS27.1 69.89,29.66 J27.1
J/RS15
  Top 0.406: U15.J 79.17,27.82 79.48,28.13 J29.1
  Bottom 0.406: JS29.1 80.75,29.66 J29.1
J/RS16
  Top 0.406: U16.J 90.03,27.82 90.34,28.13 J31.1
  Bottom 0.406: JS31.1 91.61,29.66 J31.1
J/RS17
  Top 0.406: U17.J 14.01,44.27 14.32,44.58 J33.1
  Bottom 0.406: JS33.1 15.59,46.1 J33.1
J/RS18
  Top 0.406: U18.J 24.87,44.27 25.18,44.58 J35.1
  Bottom 0.406: JS35.1 26.45,46.1 J35.1
J/RS19
  Top 0.406: U19.J 35.73,44.27 36.04,44.58 J37.1
  Bottom 0.406: JS37.1 37.31,46.1 J37.1
J/RS20
  Top 0.406: U20.J 46.59,44.27 46.9,44.58 J39.1
  Bottom 0.406: JS39.1 48.17,46.1 J39.1
J/RS21
  Top 0.406: U21.J 57.45,44.27 57.76,44.58 J41.1
  Bottom 0.406: JS41.1 59.03,46.1 J41.1
J/RS22
  Top 0.406: U22.J 68.31,44.27 68.62,44.58 J43.1
  Bottom 0.406: JS43.1 69.89,46.1 J43.1
J/RS23
  Top 0.406: U23.J 79.17,44.27 79.48,44.58 J45.1
  Bottom 0.406: JS45.1 80.75,46.1 J45.1
J/RS24
  Top 0.406: U24.J 90.03,44.27 90.34,44.58 J47.1
  Bottom 0.406: JS47.1 91.61,46.1 J47.1
J/RS25
  Top 0.406: U25.J 14.01,60.72 14.32,61.03 J49.1
  Bottom 0.406: JS49.1 15.59,62.55 J49.1
J/RS26
  Top 0.406: U26.J 24.87,60.72 25.18,61.03 J51.1
  Bottom 0.406: JS51.1 26.45,62.55 J51.1
J/RS27
  Top 0.406: U27.J 35.73,60.72 36.04,61.03 J53.1
  Bottom 0.406: JS53.1 37.31,62.55 J53.1
J/RS28
  Top 0.406: U28.J 46.59,60.72 46.9,61.03 J55.1
  Bottom 0.406: JS55.1 48.17,62.55 J55.1
J/RS29
  Top 0.406: U29.J 57.45,60.72 57.76,61.03 J57.1
  Bottom 0.406: JS57.1 59.03,62.55 J57.1
J/RS30
  Top 0.406: U30.J 68.31,60.72 68.62,61.03 J59.1
  Bottom 0.406: JS59.1 69.89,62.55 J59.1
J/RS31
  Top 0.406: U31.J 79.17,60.72 79.48,61.03 J61.1
  Bottom 0.406: JS61.1 80.75,62.55 J61.1
J/RS32
  Top 0.406: U32.J 90.03,60.72 90.34,61.03 J63.1
  Bottom 0.406: JS63.1 91.61,62.55 J63.1
N$1
  Top 0.406: RL.1 7.59,7.49 7.97,7.87 U1.B
N$2
  Top 0.406: RL1.1 18.45,7.49 18.83,7.87 U2.B
N$3
  Top 0.406: RL2.1 29.31,7.49 29.69,7.87 U3.B
N$4
  Top 0.406: RL3.1 40.17,7.49 40.55,7.87 U4.B
N$5
  Top 0.406: RL4.1 51.03,7.49 51.41,7.87 U5.B
N$6
  Top 0.406: RL5.1 61.89,7.49 62.27,7.87 U6.B
N$7
  Top 0.406: RL6.1 72.75,7.49 73.13,7.87 U7.B
N$8
  Top 0.406: RL7.1 83.61,7.49 83.99,7.87 U8.B
N$9
  Top 0.406: RL8.1 7.59,23.94 7.97,24.32 U9.B
N$10
  Top 0.406: RL9.1 18.45,23.94 18.83,24.32 U10.B
N$11
  Top 0.406: RL10.1 29.31,23.94 29.69,24.32 U11.B
N$12
  Top 0.406: RL11.1 40.17,23.94 40.55,24.32 U12.B
N$13
  Top 0.406: RL12.1 51.03,23.94 51.41,24.32 U13.B
N$14
  Top 0.406: RL13.1 61.89,23.94 62.27,24.32 U14.B
N$15
  Top 0.406: RL14.1 72.75,23.94 73.13,24.32 U15.B
N$16
  Top 0.406: RL15.1 83.61,23.94 83.99,24.32 U16.B
N$17
  Top 0.406: RL16.1 7.59,40.39 7.97,40.77 U17.B
N$18
  Top 0.406: RL17.1 18.45,40.39 18.83,40.77 U18.B
N$19
  Top 0.406: RL18.1 29.31,40.39 29.69,40.77 U19.B
N$20
  Top 0.406: RL19.1 40.17,40.39 40.55,40.77 U20.B
N$21
  Top 0.406: RL20.1 51.03,40.39 51.41,40.77 U21.B
N$22
  Top 0.406: RL21.1 61.89,40.39 62.27,40.77 U22.B
N$23
  Top 0.406: RL22.1 72.75,40.39 73.13,40.77 U23.B
N$24
  Top 0.406: RL23.1 83.61,40.39 83.99,40.77 U24.B
N$25
  Top 0.406: RL24.1 7.59,56.84 7.97,57.22 U25.B
N$26
  Top 0.406: RL25.1 18.45,56.84 18.83,57.22 U26.B
N$27
  Top 0.406: RL26.1 29.31,56.84 29.69,57.22 U27.B
N$28
  Top 0.406: RL27.1 40.17,56.84 40.55,57.22 U28.B
N$29
  Top 0.406: RL28.1 51.03,56.84 51.41,57.22 U29.B
N$30
  Top 0.406: RL29.1 61.89,56.84 62.27,57.22 U30.B
N$31
  Top 0.406: RL30.1 72.75,56.84 73.13,57.22 U31.B
N$32
  Top 0.406: RL31.1 83.61,56.84 83.99,57.22 U32.B

## Text on the board
tPlace: Rh1 | Rh2 | Rs2 | v1.0 | Rh1 | Rh2 | Rs2 | v1.0 | Rh1 | Rh2 | Rs2 | v1.0 | Rh1 | Rh2 | Rs2 | v1.0 | Rh1 | Rh2 | Rs2 | v1.0 | Rh1 | Rh2 | Rs2 | v1.0 | Rh1 | Rh2 | Rs2 | v1.0 | Rh1 | Rh2 | Rs2 | v1.0 | NO2 | NO2 | NO2 | NO2 | NO2 | NO2 | NO2 | NO2 | GND | Rs1 | 5V | GND | Rs1 | 5V | GND | Rs1 | 5V | GND | Rs1 | 5V | GND | Rs1 | 5V | GND | Rs1 | 5V | GND | Rs1 | 5V | GND | Rs1 | 5V | Rh1 | Rh2 | Rs2 | v1.0 | Rh1 | Rh2 | Rs2 | v1.0 | Rh1 | Rh2 | Rs2 | v1.0 | Rh1 | Rh2 | Rs2 | v1.0 | Rh1 | Rh2 | Rs2 | v1.0 | Rh1 | Rh2 | Rs2 | v1.0 | Rh1 | Rh2 | Rs2 | v1.0 | Rh1 | Rh2 | Rs2 | v1.0 | NO2 | NO2 | NO2 | NO2 | NO2 | NO2 | NO2 | NO2 | GND | Rs1 | 5V | GND | Rs1 | 5V | GND | Rs1 | 5V | GND | Rs1 | 5V | GND | Rs1 | 5V | GND | Rs1 | 5V | GND | Rs1 | 5V | GND | Rs1 | 5V | Rh1 | Rh2 | Rs2 | v1.0 | Rh1 | Rh2 | Rs2 | v1.0 | Rh1 | Rh2 | Rs2 | v1.0 | Rh1 | Rh2 | Rs2 | v1.0 | Rh1 | Rh2 | Rs2 | v1.0 | Rh1 | Rh2 | Rs2 | v1.0 | Rh1 | Rh2 | Rs2 | v1.0 | Rh1 | Rh2 | Rs2 | v1.0 | NO2 | NO2 | NO2 | NO2 | NO2 | NO2 | NO2 | NO2 | GND | Rs1 | 5V | GND | Rs1 | 5V | GND | Rs1 | 5V | GND | Rs1 | 5V | GND | Rs1 | 5V | GND | Rs1 | 5V | GND | Rs1 | 5V | GND | Rs1 | 5V | Rh1 | Rh2 | Rs2 | v1.0 | Rh1 | Rh2 | Rs2 | v1.0 | Rh1 | Rh2 | Rs2 | v1.0 | Rh1 | Rh2 | Rs2 | v1.0 | Rh1 | Rh2 | Rs2 | v1.0 | Rh1 | Rh2 | Rs2 | v1.0 | Rh1 | Rh2 | Rs2 | v1.0 | Rh1 | Rh2 | Rs2 | v1.0 | NO2 | NO2 | NO2 | NO2 | NO2 | NO2 | NO2 | NO2 | GND | Rs1 | 5V | GND | Rs1 | 5V | GND | Rs1 | 5V | GND | Rs1 | 5V | GND | Rs1 | 5V | GND | Rs1 | 5V | GND | Rs1 | 5V | GND | Rs1 | 5V
bPlace: Rh1 | Rh2 | Rs2 | Rh1 | Rh2 | Rs2 | Rh1 | Rh2 | Rs2 | Rh1 | Rh2 | Rs2 | Rh1 | Rh2 | Rs2 | Rh1 | Rh2 | Rs2 | Rh1 | Rh2 | Rs2 | Rh1 | Rh2 | Rs2 | acrobotic.com | acrobotic.com | acrobotic.com | acrobotic.com | acrobotic.com | acrobotic.com | acrobotic.com | acrobotic.com | Rs1 | Rh1 | Rs1 | Rh1 | Rs1 | Rh1 | Rs1 | Rh1 | Rs1 | Rh1 | Rs1 | Rh1 | Rs1 | Rh1 | Rs1 | Rh1 | GND | Rs1 | 5V | GND | Rs1 | 5V | GND | Rs1 | 5V | GND | Rs1 | 5V | GND | Rs1 | 5V | GND | Rs1 | 5V | GND | Rs1 | 5V | GND | Rs1 | 5V | Rh1 | Rh2 | Rs2 | Rh1 | Rh2 | Rs2 | Rh1 | Rh2 | Rs2 | Rh1 | Rh2 | Rs2 | Rh1 | Rh2 | Rs2 | Rh1 | Rh2 | Rs2 | Rh1 | Rh2 | Rs2 | Rh1 | Rh2 | Rs2 | acrobotic.com | acrobotic.com | acrobotic.com | acrobotic.com | acrobotic.com | acrobotic.com | acrobotic.com | acrobotic.com | Rs1 | Rh1 | Rs1 | Rh1 | Rs1 | Rh1 | Rs1 | Rh1 | Rs1 | Rh1 | Rs1 | Rh1 | Rs1 | Rh1 | Rs1 | Rh1 | GND | Rs1 | 5V | GND | Rs1 | 5V | GND | Rs1 | 5V | GND | Rs1 | 5V | GND | Rs1 | 5V | GND | Rs1 | 5V | GND | Rs1 | 5V | GND | Rs1 | 5V | Rh1 | Rh2 | Rs2 | Rh1 | Rh2 | Rs2 | Rh1 | Rh2 | Rs2 | Rh1 | Rh2 | Rs2 | Rh1 | Rh2 | Rs2 | Rh1 | Rh2 | Rs2 | Rh1 | Rh2 | Rs2 | Rh1 | Rh2 | Rs2 | acrobotic.com | acrobotic.com | acrobotic.com | acrobotic.com | acrobotic.com | acrobotic.com | acrobotic.com | acrobotic.com | Rs1 | Rh1 | Rs1 | Rh1 | Rs1 | Rh1 | Rs1 | Rh1 | Rs1 | Rh1 | Rs1 | Rh1 | Rs1 | Rh1 | Rs1 | Rh1 | GND | Rs1 | 5V | GND | Rs1 | 5V | GND | Rs1 | 5V | GND | Rs1 | 5V | GND | Rs1 | 5V | GND | Rs1 | 5V | GND | Rs1 | 5V | GND | Rs1 | 5V | Rh1 | Rh2 | Rs2 | Rh1 | Rh2 | Rs2 | Rh1 | Rh2 | Rs2 | Rh1 | Rh2 | Rs2 | Rh1 | Rh2 | Rs2 | Rh1 | Rh2 | Rs2 | Rh1 | Rh2 | Rs2 | Rh1 | Rh2 | Rs2 | acrobotic.com | acrobotic.com | acrobotic.com | acrobotic.com | acrobotic.com | acrobotic.com | acrobotic.com | acrobotic.com | Rs1 | Rh1 | Rs1 | Rh1 | Rs1 | Rh1 | Rs1 | Rh1 | Rs1 | Rh1 | Rs1 | Rh1 | Rs1 | Rh1 | Rs1 | Rh1 | GND | Rs1 | 5V | GND | Rs1 | 5V | GND | Rs1 | 5V | GND | Rs1 | 5V | GND | Rs1 | 5V | GND | Rs1 | 5V | GND | Rs1 | 5V | GND | Rs1 | 5V
_tNames: R1 | R1 | R1 | R1 | R1 | R1 | R1 | R1 | RL | RL | RL | RL | RL | RL | RL | RL | R1 | R1 | R1 | R1 | R1 | R1 | R1 | R1 | RL | RL | RL | RL | RL | RL | RL | RL | R1 | R1 | R1 | R1 | R1 | R1 | R1 | R1 | RL | RL | RL | RL | RL | RL | RL | RL | R1 | R1 | R1 | R1 | R1 | R1 | R1 | R1 | RL | RL | RL | RL | RL | RL | RL | RL